# Altium PCB 24.064_HEAT.PcbDoc
Units mm, origin at the board's own origin, x right, y up, seen from the top; angles counter-clockwise.
Board outline 69 x 64 mm, 2 copper layers (Top Layer, Bottom Layer); 3 components, 16 nets, 33 pads, 0 vias.
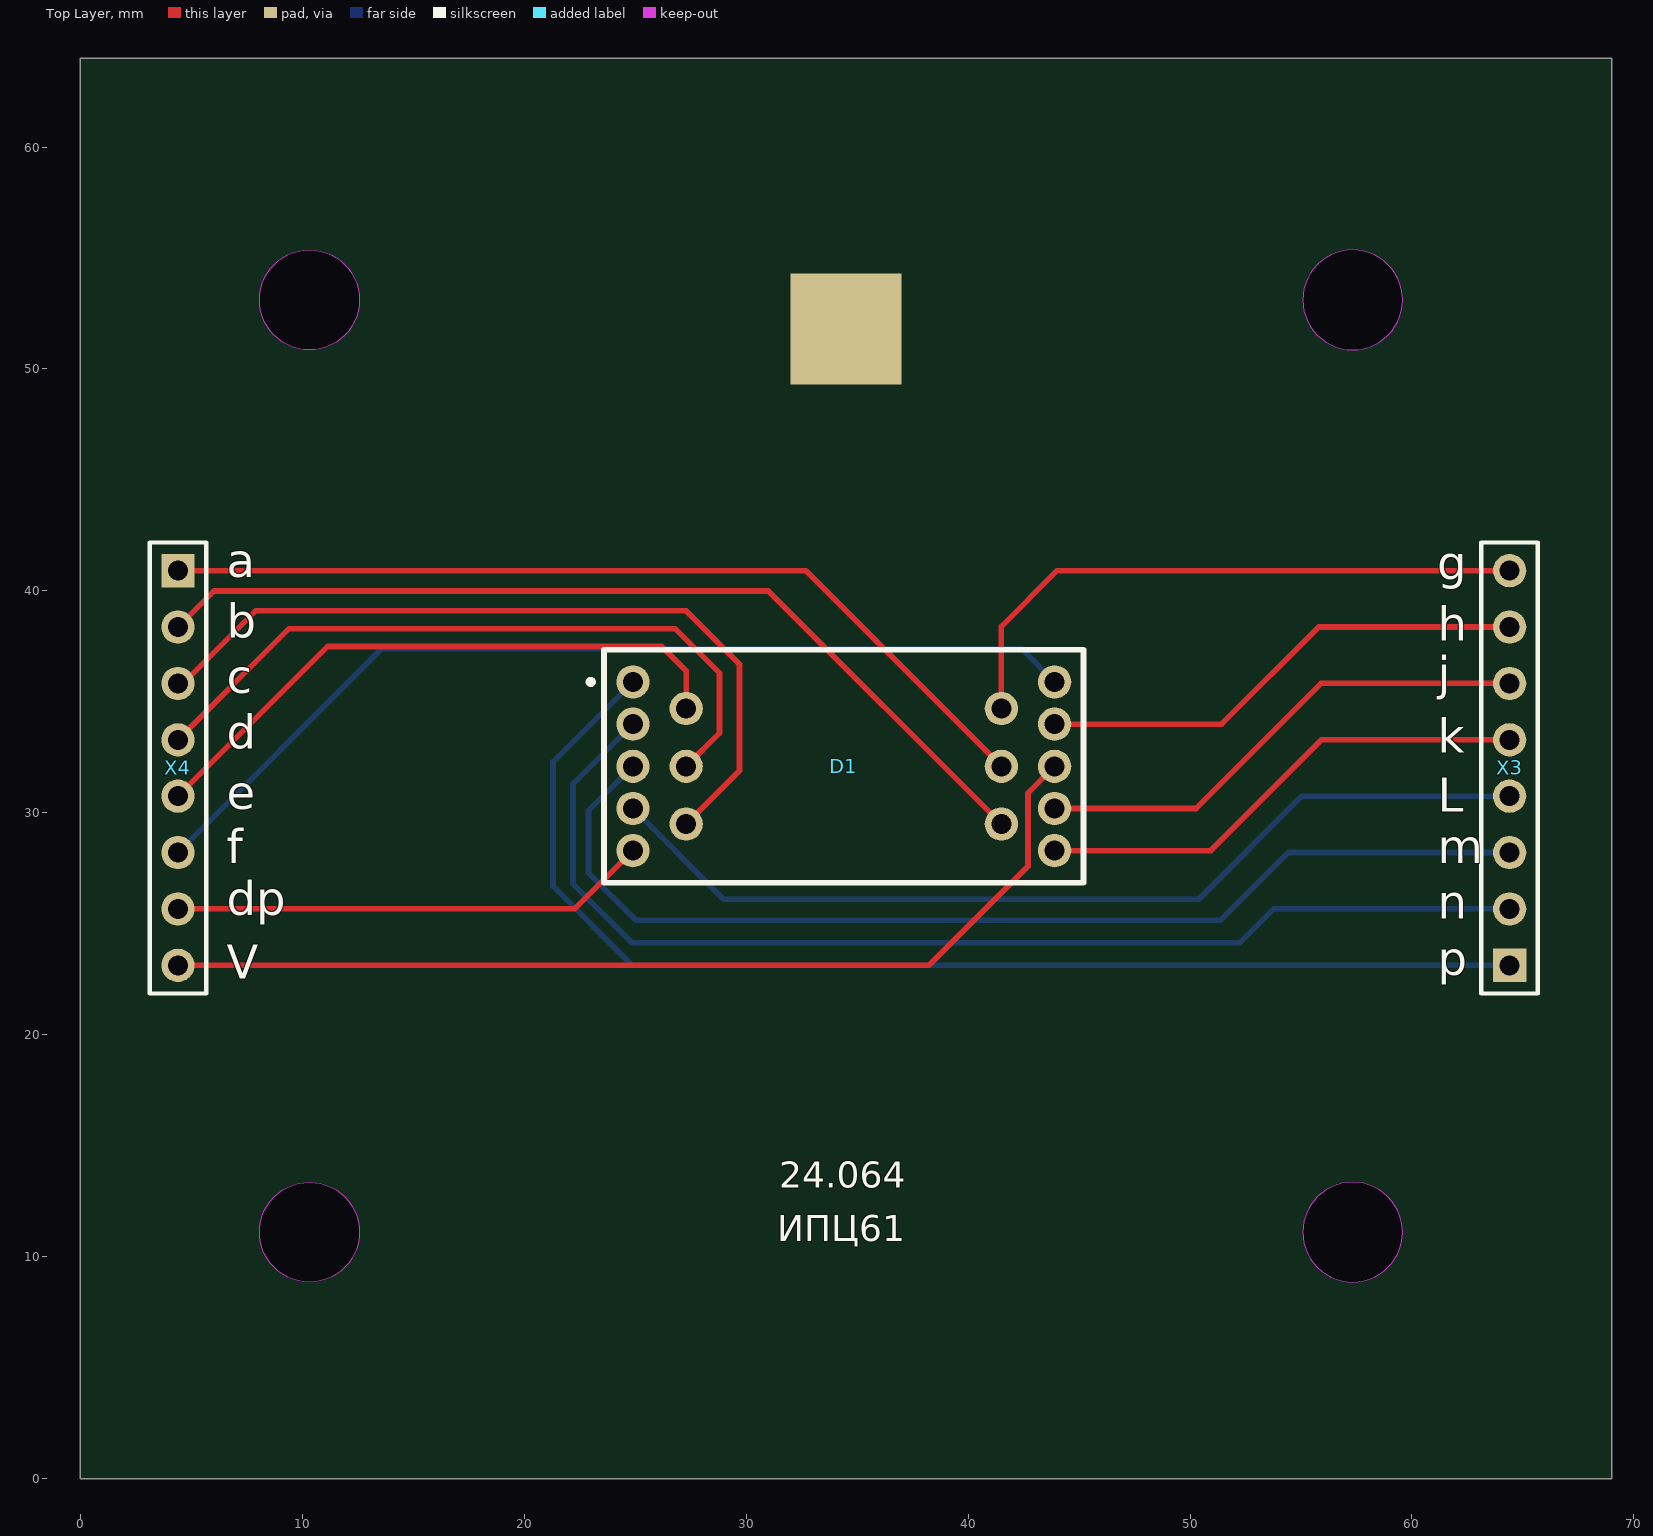
[diagram p0: Top Layer view]
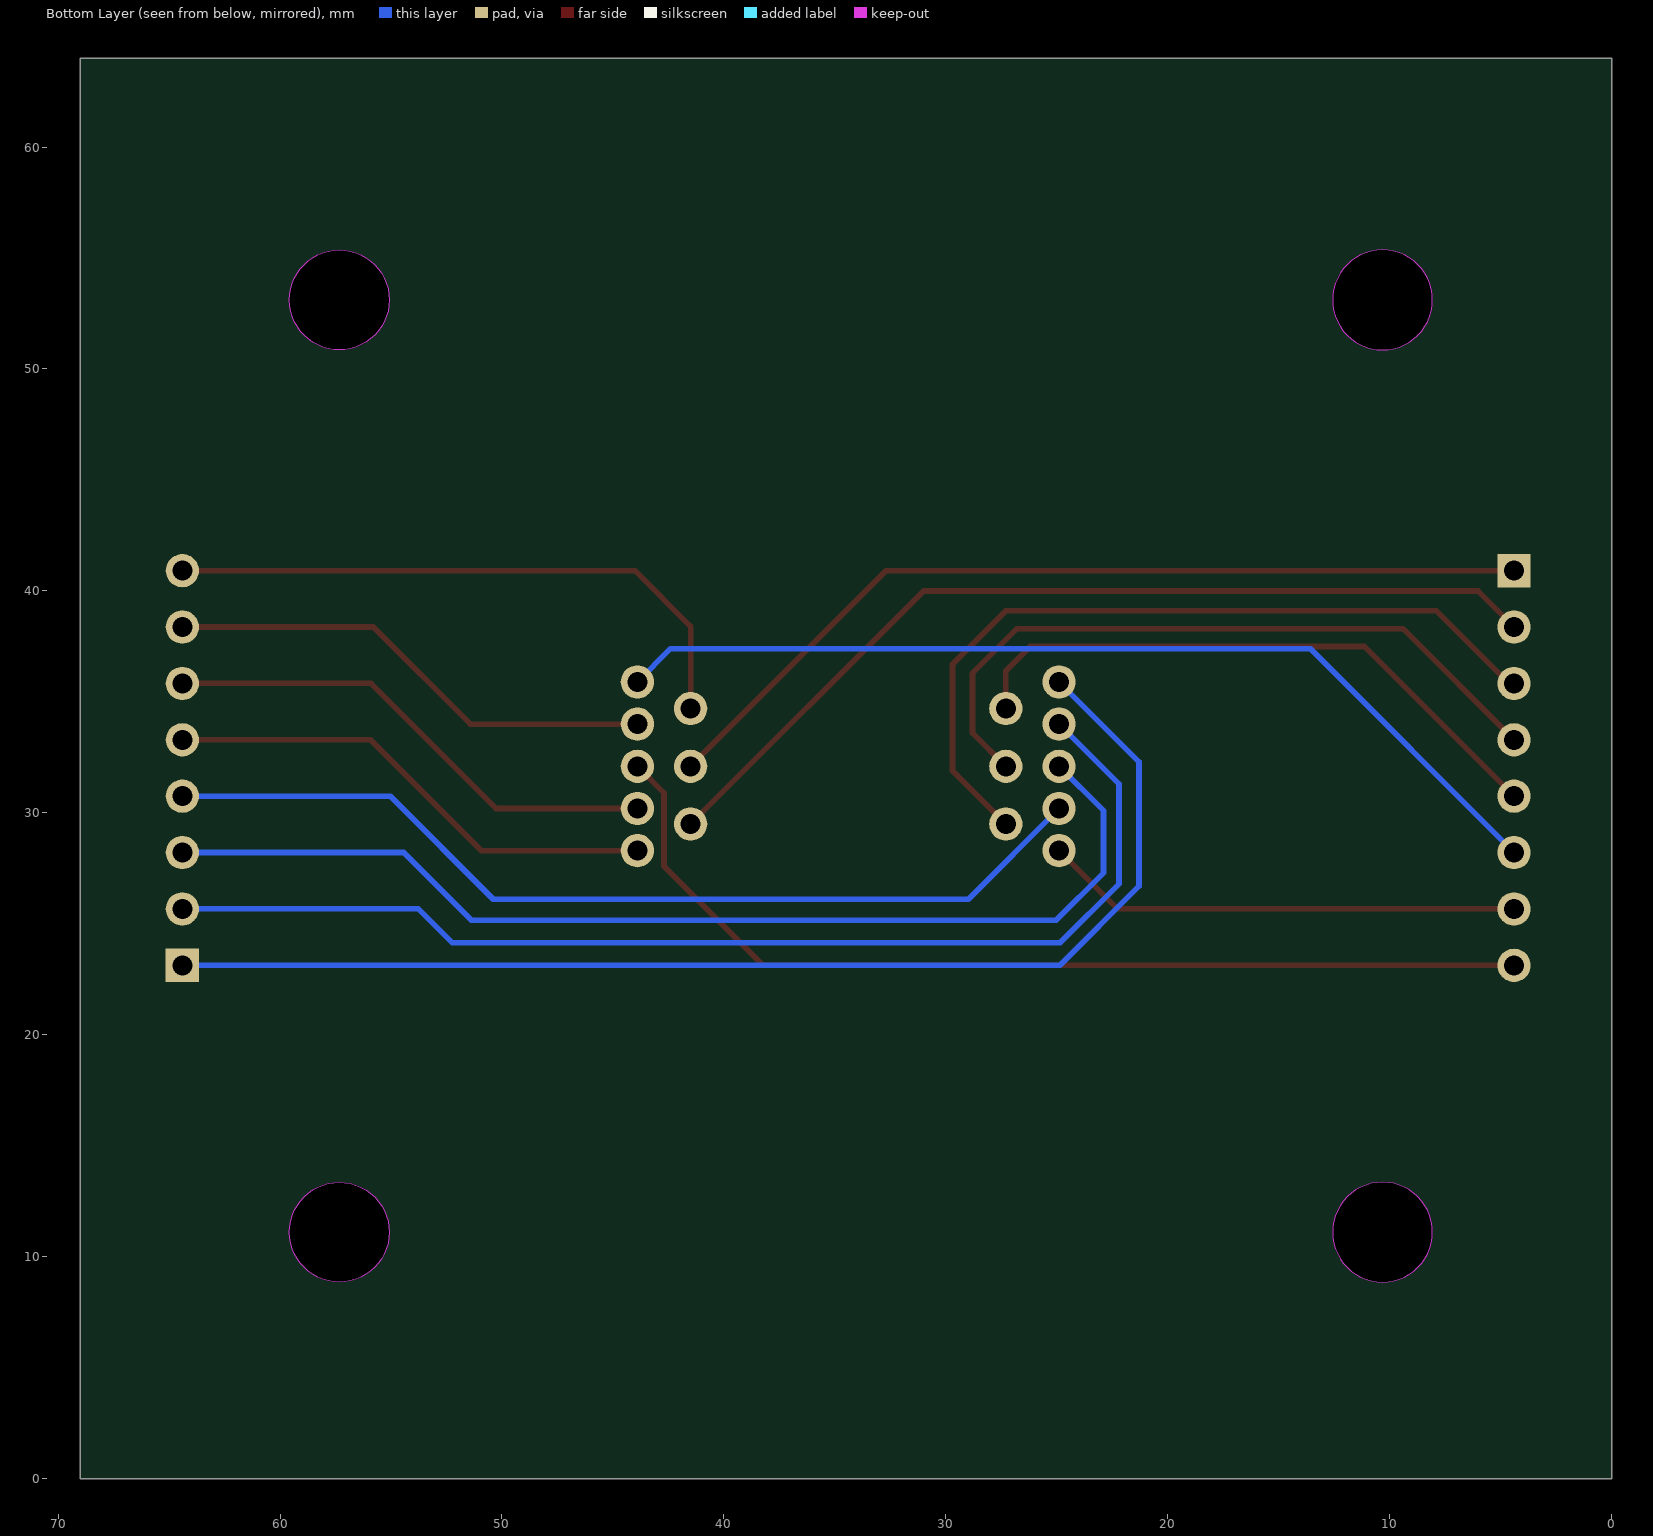
[diagram p1: Bottom Layer view, seen from below]

## Layer stack, top to bottom
Top Solder: solder mask 0.0102, Solder Resist, Dk 3.5
Top Layer: signal copper 0.0356
Dielectric 1: dielectric 0.32, FR-4, Dk 4.8
Bottom Layer: signal copper 0.0356
Bottom Solder: solder mask 0.0102, Solder Resist, Dk 3.5

## Board outline
69,0 0,0 0,64 69,64
cut-out: 55.078,11.111 ccw(c57.328,11.111) 57.328,8.861 ccw(c57.328,11.111) 59.578,11.111 ccw(c57.328,11.111) 57.328,13.361 ccw(c57.328,11.111)
cut-out: 10.328,8.861 cw(c10.328,11.111) 8.078,11.111 cw(c10.328,11.111) 10.328,13.361 cw(c10.328,11.111) 12.578,11.111 cw(c10.328,11.111)
cut-out: 55.078,53.111 ccw(c57.328,53.111) 57.328,50.861 ccw(c57.328,53.111) 59.578,53.111 ccw(c57.328,53.111) 57.328,55.361 ccw(c57.328,53.111)
cut-out: 10.328,50.861 cw(c10.328,53.111) 8.078,53.111 cw(c10.328,53.111) 10.328,55.361 cw(c10.328,53.111) 12.578,53.111 cw(c10.328,53.111)

## Design rules (kind name [scope] priority, off if disabled: settings)
Clearance [All] p1: gap=0.254 ignorepadtopadclearanceinfootprint=FALSE except(0: Arc-Hole Track-Hole SMDPad-Hole THPad-Hole Via-Hole Fill-Hole Poly-Hole Region-Hole Text-Hole)
PolygonConnect [All] p1: connectstyle=Relief reliefconductorwidth=0.254 reliefentries=4 polygonreliefangle="90 Angle" airgapwidth=0.254
RoutingVias [All] p1: holewidth=0.711 width=1.27 viastyle="Through Hole" minholewidth=0.711 minwidth=1.27 maxholewidth=0.711 maxwidth=1.27
SolderMaskExpansion [All] p1: expansion=0.102
Width [All] p1: maxlimit=0.254 minlimit=0.254 preferedwidth=0.254
30 further rules are at their usual default settings.

## Components (designator, comment, footprint, x,y, rotation, side; value= is the part's Value field where it differs from the comment)
D1 "Indicator 14" "INDICATIR 14" 24.9,35.9 r270 top
X3 "Header 8" HDR1X8 64.4,23.134 r90 top
X4 "Header 8" HDR1X8 4.4,40.914 r270 top

## Footprints (in the part's own frame and the unit in brackets; to place one, negate y for a bottom-side part, rotate by r counter-clockwise, add the part's x,y. Pads: shape width x height; smd on the part's side, far side on the other; paste and mask are expansions set on the pad)
HDR1X8 [mm] "Connector; Header; 8 Position"
  rect 1.5x1.5 hole 0.9: 1(0,0)
  round 1.5 hole 0.9: 2(2.54,0) 3(5.08,0) 4(7.62,0) 5(10.16,0) 6(12.7,0) 7(15.24,0) 8(17.78,0)
  silkscreen extent -1.27,-1.27 19.05,1.27
"INDICATIR 14" [mm] "24.064"
  round 1.5 hole 0.9: 1(0,0) 2(1.9,0) 3(3.8,0) 4(5.7,0) 5(7.6,0) 6(6.4,2.4) 7(3.8,2.4) 8(1.2,2.4) 9(1.2,16.6) 10(3.8,16.6) 11(6.4,16.6) 12(7.6,19) 13(5.7,19) 14(3.8,19) 15(1.9,19) 16(0,19)
  silkscreen extent -1.45,-2 9.05,20.3

## Part data
X3 X4: "Header, 8-Pin", LatestRevisionDate=17-Jul-2002, LatestRevisionNote="Re-released for DXP Platform.", Publisher="Altium Limited"

## Free pads (board coordinates)
  rect 5x5 smd: 0(34.5,51.8)

## Nets (pads, with @x,y where several pads share a name; then routed paths per layer and width w, separated by ;. In a path a pad name is that pad's centre, name@x,y a point inside that pad or via, vN(x,y) a via of type N, cw(c..) or ccw(c..) an arc to the next point about the centre after c; other vN are vias at no path point)
a: D1.10 X4.1 | length 40.8
  Top Layer w0.254: X4.1 32.686,40.914 D1.10
b: D1.11 X4.2 | length 42.1
  Top Layer w0.254: X4.2 6.026,40 31,40 D1.11
c: D1.6 X4.3 | length 35.8
  Top Layer w0.254: X4.3 4.634,35.834 7.9,39.1 27.3,39.1 29.7,36.7 29.7,31.9 D1.6
d: D1.7 X4.4 | length 32.1
  Top Layer w0.254: X4.4 9.406,38.3 26.8,38.3 28.8,36.3 28.8,33.6 D1.7
dp: D1.5 X4.7 | length 21.6
  Top Layer w0.254: X4.7 22.274,25.674 D1.5
e: D1.8 X4.5 | length 27.9
  Top Layer w0.254: X4.5 11.146,37.5 26.2,37.5 27.3,36.4 D1.8
f: D1.16 X4.6 | length 43.9
  Bottom Layer w0.254: X4.6 13.586,37.4 42.4,37.4 D1.16
g: D1.9 X3.8 | length 27.6
  Top Layer w0.254: D1.9 41.5,38.4 44.014,40.914 X3.8
h: D1.15 X3.7 | length 22.3
  Top Layer w0.254: D1.15 51.424,34 55.798,38.374 X3.7
j: D1.13 X3.6 | length 22.8
  Top Layer w0.254: D1.13 50.266,30.2 55.9,35.834 X3.6
k: D1.12 X3.5 | length 22.6
  Top Layer w0.254: D1.12 50.931,28.3 55.925,33.294 X3.5
l: D1.4 X3.4 | length 43.1
  Bottom Layer w0.254: D1.4 28.989,26.111 50.394,26.111 55.036,30.754 X3.4
m: D1.3 X3.3 | length 49.3
  Bottom Layer w0.254: D1.3 22.9,30.1 22.9,27.3 25.029,25.171 51.384,25.171 54.426,28.214 X3.3
n: D1.2 X3.2 | length 52.2
  Bottom Layer w0.254: D1.2 22.2,31.3 22.2,26.8 24.845,24.155 52.248,24.155 53.766,25.674 X3.2
p: D1.1 X3.1 | length 55.3
  Bottom Layer w0.254: D1.1 21.3,32.3 21.3,26.7 24.866,23.134 X3.1
VCC: D1.14 X4.8 | length 45.1
  Top Layer w0.254: X4.8 38.234,23.134 42.697,27.597 42.697,30.897 D1.14

## Silkscreen, mask and mechanical layers (free items; w line width, h text height)
Top Overlay:
  text "a" at 6.61,40.609 h1.52
  text "g" at 61.144,40.507 h1.52
  text "b" at 6.61,37.891 h1.52
  text "h" at 61.169,37.764 h1.52
  text "j" at 61.169,35.529 h1.52
  text "c" at 6.61,35.402 h1.52
  text "d" at 6.61,32.887 h1.52
  text "k" at 61.169,32.709 h1.52
  text "e" at 6.61,30.169 h1.52
  text "L" at 61.169,30.042 h1.52
  text "f" at 6.61,27.731 h1.52
  text "m" at 61.169,27.731 h1.52
  text "dp" at 6.61,25.394 h1.52
  text "n" at 61.169,25.242 h1.52
  text "p" at 61.169,22.676 h1.52
  text "V" at 6.61,22.524 h1.52
  text "24.064" at 31.5,12.7 h2.03
  text "ИПЦ61" at 31.4,10.3 h2.03
Mechanical 1:
  circle w0.254: c10.328,53.111 r2.25
  circle w0.254: c57.328,53.111 r2.25
  circle w0.254: c57.328,11.111 r2.25
  circle w0.254: c10.328,11.111 r2.25
  lines w0.254: 0,0 0,64 69,64 69,0 0,0